# Altium PCB Son_BU_V2.PcbDoc
Units mil, origin at the board's own origin, x right, y up, seen from the top; angles counter-clockwise.
Board outline 6000 x 4000 mil, 2 copper layers (Top Layer, Bottom Layer); 38 components, 24 nets, 120 pads, 33 vias.
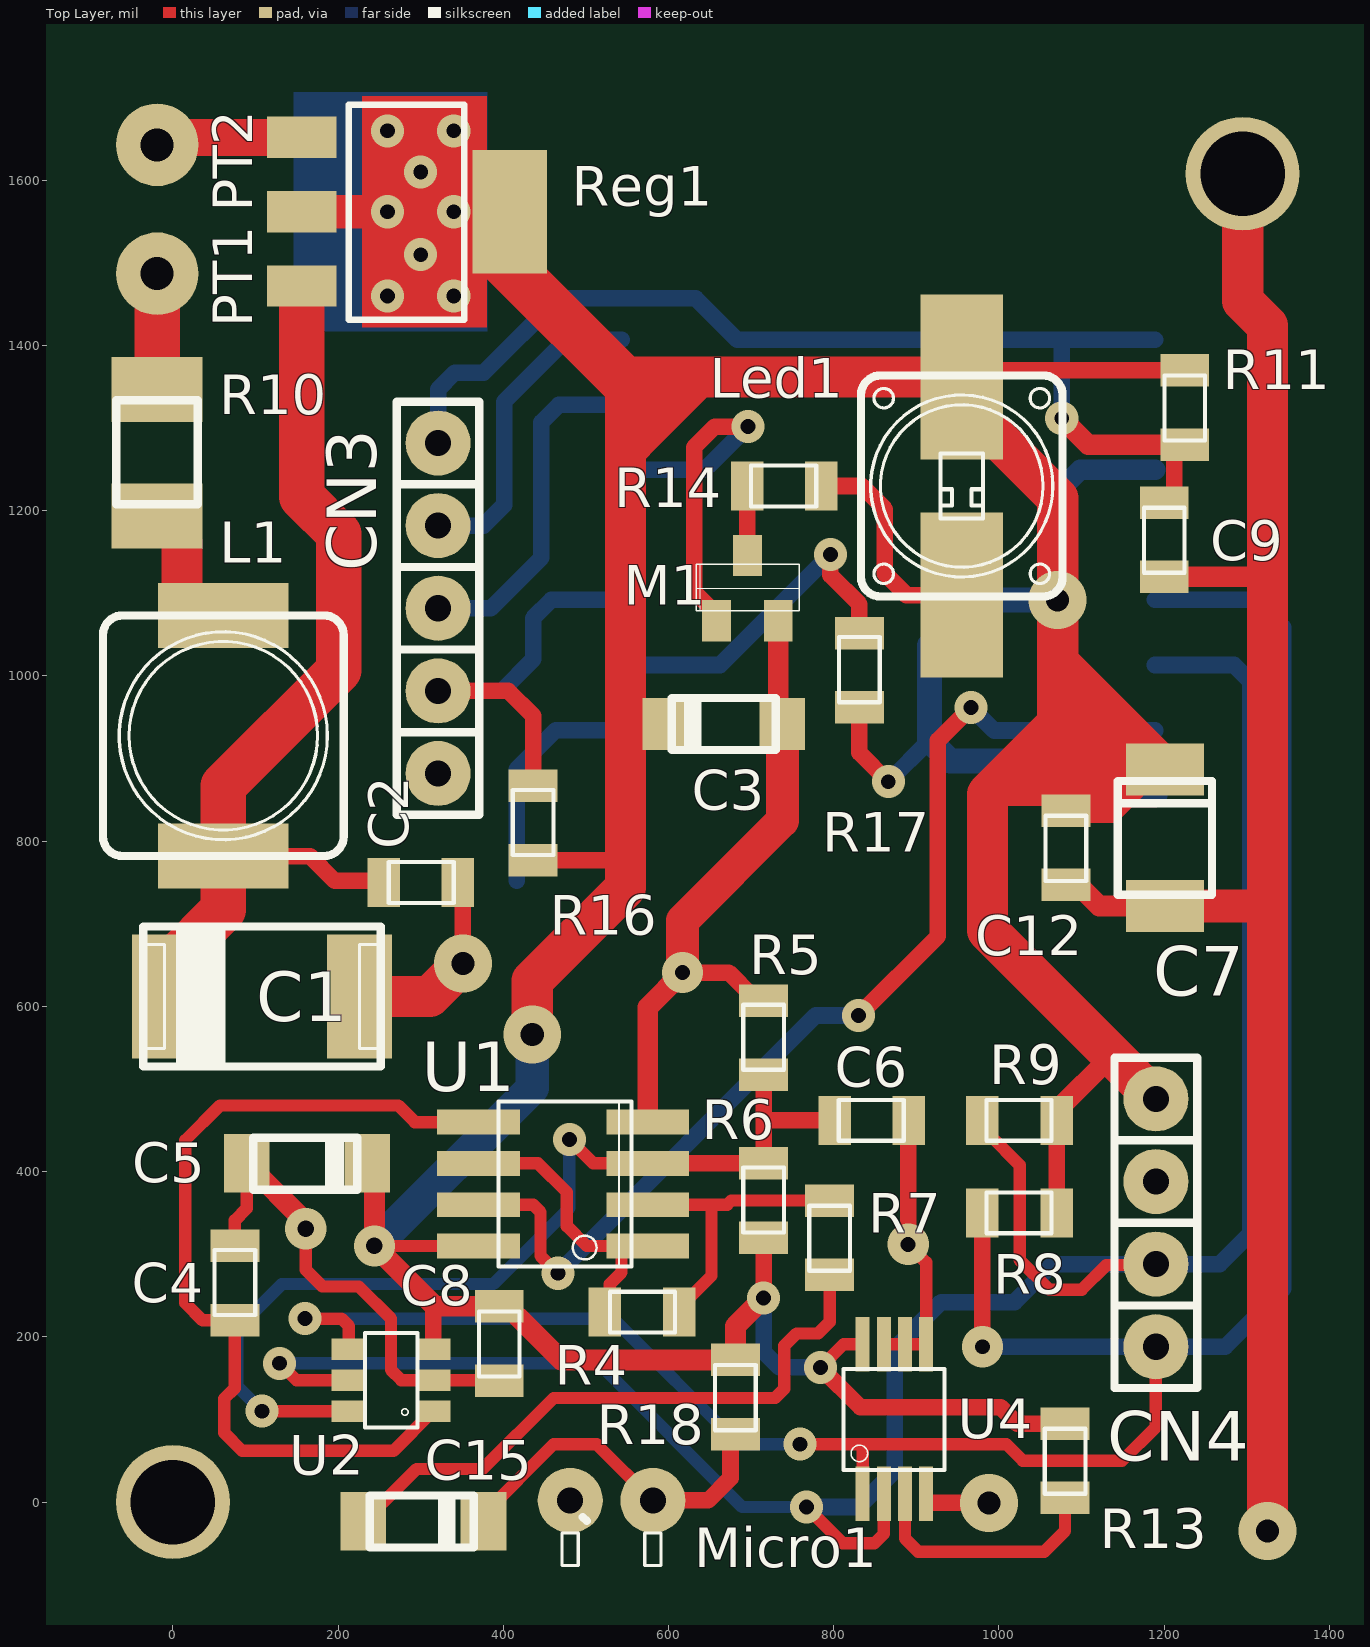
[diagram p0: Top Layer view]
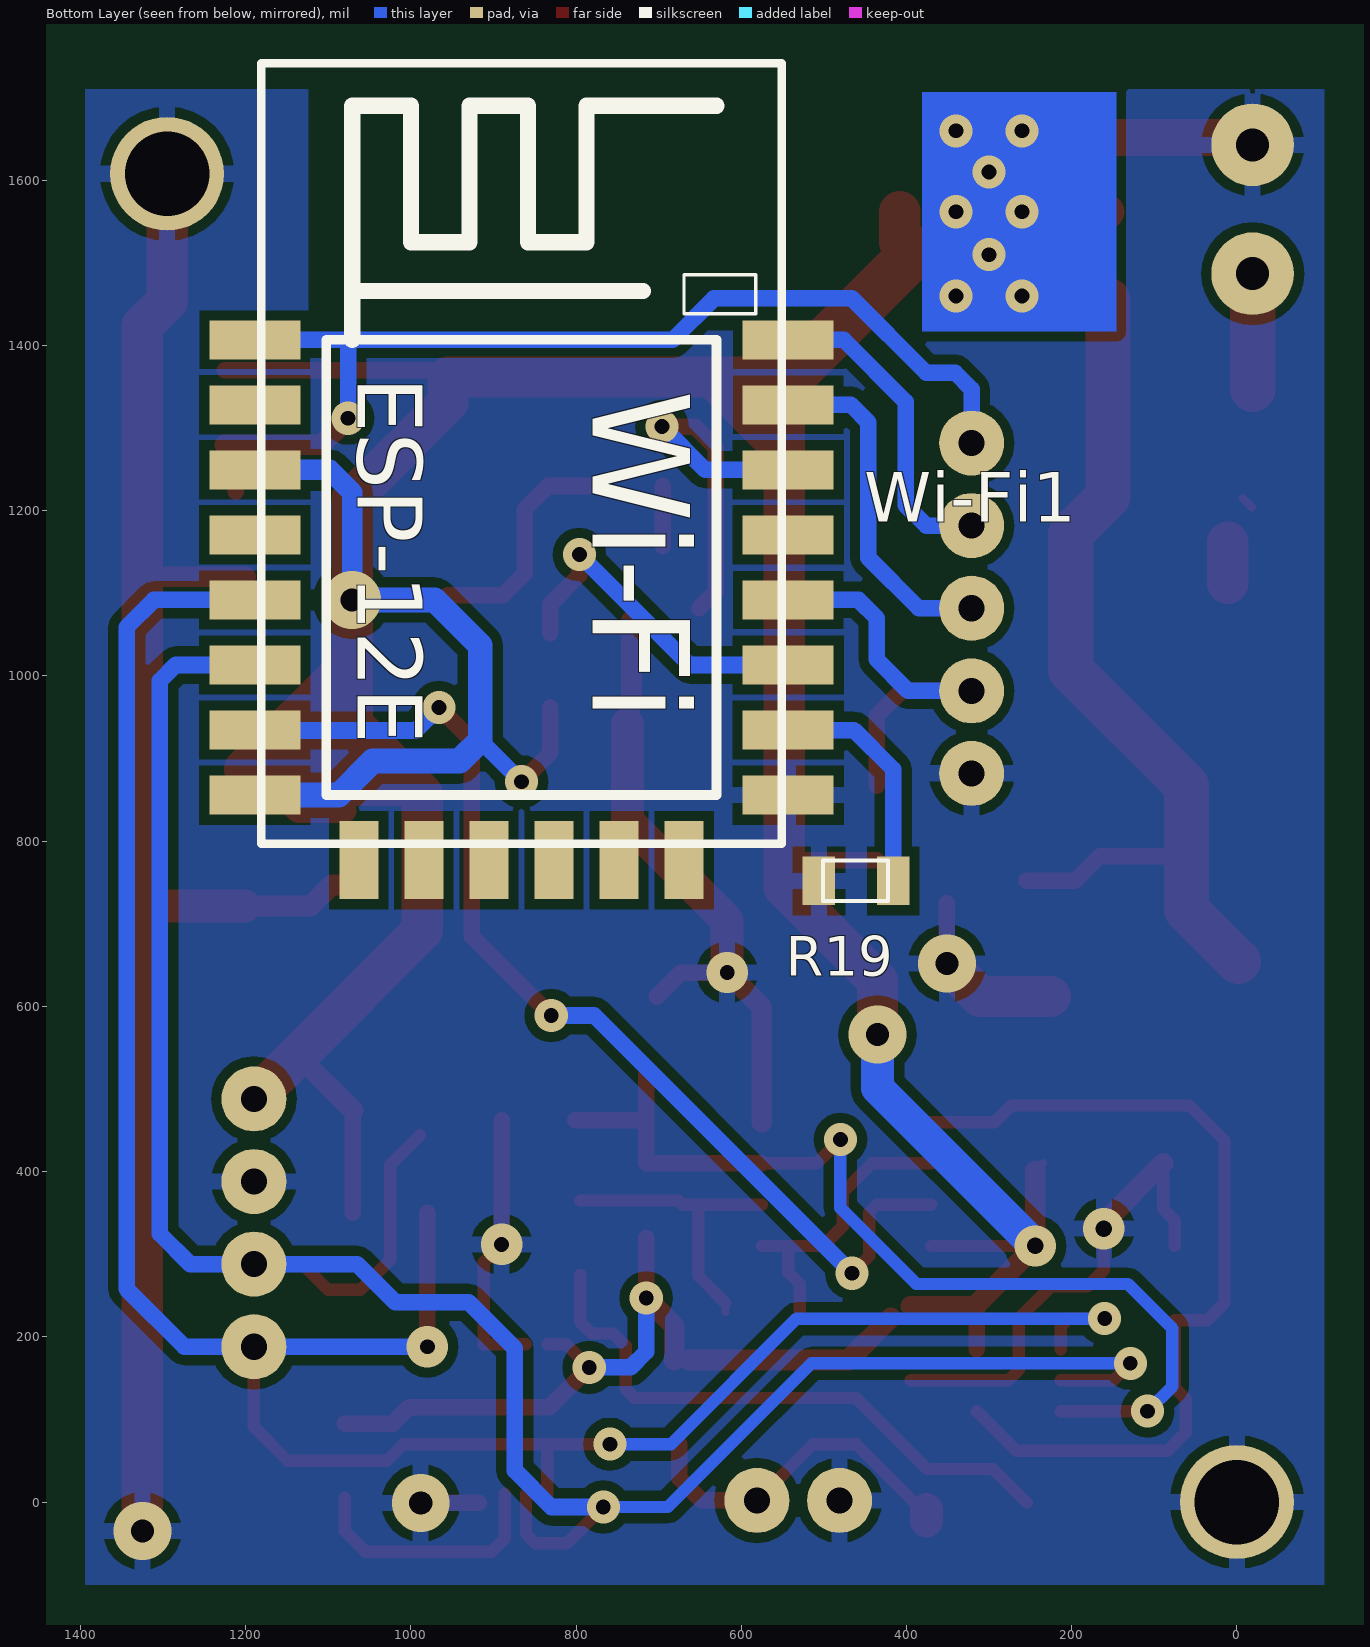
[diagram p1: Bottom Layer view, seen from below]

## Layer stack, top to bottom
Top Layer: signal copper 1.4
Dielectric: dielectric 12.6, FR-4, Dk 4.8
Bottom Layer: signal copper 1.4

## Board outline
-1419,-873 4581,-873 4581,3127 -1419,3127

## Design rules (kind name [scope] priority, off if disabled: settings)
Clearance [All] p1: gap=8
ComponentClearance [All] p1: gap=5 collisioncheckmode=3 verticalgap=10 showdistances=FALSE
PolygonConnect [All] p1: connectstyle=Relief reliefconductorwidth=20 reliefentries=4 polygonreliefangle="90 Angle"
RoomDefinition Son_BU_V2 [InComponentClass('Son_BU_V2')] p1: confinementstyle=ConfineIn formatcopy=TRUE lockcomponents=FALSE outline -136,-126 1424,-126 1424,1786 -136,1786
RoutingVias [All] p1: holewidth=28 width=50 viastyle="Through Hole" minholewidth=14 minwidth=40 maxholewidth=28 maxwidth=80
SilkscreenOverComponentPads [All] p1: minsilkscreentomaskgap=10
SolderMaskExpansion [All] p1: expansion=5
Width [All] p1: maxlimit=100 minlimit=10 preferedwidth=10
26 further rules are at their usual default settings.

## Components (designator, comment, footprint, x,y, rotation, side; value= is the part's Value field where it differs from the comment)
C1 "220µF/16V" 7343-31 226,612 r180 top
C2 "100n" 0805 345,750 r180 top
C3 "10µF/16V" "Tantale 10µF/16V" 596,942 r180 top
C4 "100n" 0805 75,310 r270 top
C5 "10µF/6V3 tantale" "Tantale 10µF/6V3" 235,410 r180 top
C6 "10n" 0805 801,462 r0 top
C7 "47µF/10V tantale" "tantale 47µF/10V" 1201,887 r270 top
C8 "100n" 0805 395,147 r90 top
C9 "100n" 0805 1200,1120 r90 top
C12 "100n" 0805 1081,747 r90 top
C15 "1µF/16V" 3216-18 376,-23 r180 top
CN3 "inch_ligne 1x5" INCH_1x5_droit 321,1282 r270 top
CN4 "inch_ligne 1x4" INCH_1x4_droit 1190,488 r270 top
L1 "70µH CD74R series" "SELF CD74R" 61,782 r270 top
Led1 "LTW5AM" LTW5AM 955,1230 r270 top
M1 "NTR4501N" "SOT23 (NTR4501)" 658,1067 r0 top
Micro1 "Electret" "Micro_electret simple" 581,2 r0 top
PT1 "+ Alim" "Pointe de test"#1 -19,1487 r0 top
PT2 "- Alim" "Pointe de test"#2 -19,1647 r0 top
R4 "100K" 0805 613,230 r180 top
R5 "10K" 0805 715,607 r270 top
R6 "10K" 0805 715,410 r270 top
R7 "1K" 0805 795,275 r90 top
R8 "10K" 0805 980,350 r0 top
R9 "10K" 0805 980,462 r0 top
R10 "0R33" 1210 -19,1347 r270 top
R11 "10K" 0805 1225,1280 r90 top
R13 "10K" 0805 1080,5 r90 top
R14 "68" 0805 695,1230 r0 top
R16 "10K" 0805 436,867 r270 top
R17 "10K" 0805 831,1052 r270 top
R18 "2K" 0805 681,82 r90 top
R19 "2K2" 0805 506,752 r180 bottom
Reg1 "LM1117" SOT223 156,1652 r270 top
U1 "AD8052" SOIC08 575,310 r180 top
U2 "MCP4706" SOT23-6 315,110 r180 top
U4 "MCP9808" MSOP-08 835,10 r90 top
Wi-Fi1 "ESP-12E" ESP-12E 1181,1407 r180 bottom

## Footprints (in the part's own frame and the unit in brackets; to place one, negate y for a bottom-side part, rotate by r counter-clockwise, add the part's x,y. Pads: shape width x height; smd on the part's side, far side on the other; paste and mask are expansions set on the pad)
0805 [mm] "résistance CMS"
  rect 1x1.5 smd: 1(0,0) 2(2.286,0)
  silkscreen extent 0.13,-0.63 2.13,0.63
1210 [mm] "résistance CMS 0,5W ERJ14B"
  rect 2x2.8 smd: 1(0,0) 2(3.9,0)
  silkscreen extent 0.33,-1.26 3.53,1.24
3216-18 [mm] "condensateur tantale CMS (3,2 x 1,6 x 1,6)"
  rect 1.4x1.8 smd: 1(0,0) 2(3.7,0)
  silkscreen extent 0.3,-0.79 3.5,0.81
7343-31 [mm] "condensateur tantale CMS (7,3 x 4,3 x 3,0)"
  rect 2x3.8 smd: 1(6,0) 2(0,0)
  silkscreen extent -0.65,-2.15 6.65,2.15
ESP-12E [mm] "module Wi-Fi"
  rect 2.8x1.2 smd: 1(-0.2,0) 2(-0.2,-2) 3(-0.2,-4) 4(-0.2,-6) 5(-0.2,-8) 6(-0.2,-10) 7(-0.2,-12) 8(-0.2,-14) 15(16.2,-14) 16(16.2,-12) 17(16.2,-10) 18(16.2,-8) 19(16.2,-6) 20(16.2,-4) 21(16.2,-2) 22(16.2,0)
  rect 1.2x2.4 smd: 9(3,-16) 10(5,-16) 11(7,-16) 12(9,-16) 13(11,-16) 14(13,-16)
  silkscreen extent 0,-15.5 16,8.5
INCH_1x4_droit [mm] "simple rangée 2,54 mm"
  round 2 hole 0.8: 1(0,0) 2(2.54,0) 3(5.08,0) 4(7.62,0)
  silkscreen extent -1.27,-1.27 8.89,1.27
INCH_1x5_droit [mm] "simple rangée 2,54 mm"
  round 2 hole 0.8: 1(0,0) 2(2.54,0) 3(5.08,0) 4(7.62,0) 5(10.16,0)
  silkscreen extent -1.27,-1.27 11.43,1.27
LTW5AM [mil] "LED golden dragon"
  rect 200x100 smd: 1(-132,0) 2(132,0)
  silkscreen extent -134,-122 134,122
"Micro_electret simple" [mm] "Microphone coudé sur PCB sans sérigraphie"
  round 2 hole 0.8: 0(-2.54,0) 1(0,0)
  silkscreen extent -2.79,-2 0.25,-0.51
MSOP-08 [mil] "boîtier DGK"
  rect 66x17 smd: 1(0,0) 2(0,-25.59) 3(0,-51.18) 4(0,-76.77) 5(181.1,-76.77) 6(181.1,-51.18) 7(181.1,-25.59) 8(181.1,0)
  silkscreen extent 29,-99 151,23
"Pointe de test"#1 [mil] "Farnell 133-6225"
  round 100 hole 40: 1(0,0)
"Pointe de test"#2 [mil] "Farnell 133-6225"
  round 100 hole 40: 1(0,-4)
"SELF CD74R" [mm] "Self 7,4 x 7,4"
  rect 2x4 smd: 1(0,0) 2(-7.4,0)
  silkscreen extent -7.4,-3.7 0,3.7
SOIC08 [mil]
  rect 100x30 smd: 1(0,0) 2(0,-50) 3(0,-100) 4(0,-150) 5(205,-150) 6(205,-100) 7(205,-50) 8(205,0)
  silkscreen extent 20,-175 181,25
"SOT23 (NTR4501)" [mil] "D->1 G->2 S->3"
  rect 35x50 smd: 1(37.4,78.74) 2(0,0) 3(74.8,0)
  silkscreen extent -25,12 100,68
SOT23-6 [mil]
  rect 42x26 smd: 1(0,0) 2(0,-37.4) 3(0,-74.8) 4(102,-74.8) 5(102,-37.4) 6(102,0)
  silkscreen extent 19,-94 83,20
SOT223 [mil] "empreinte générale SOT223"
  rect 50x84.65 smd: 1(0,0) 2(90,0) 3(180,0)
  rect 150x90 smd: 2(90,251.97)
  silkscreen extent -39,57 220,197
"Tantale 10µF/6V3" [mm] "1206 ou 3216-18 (175-4041)"
  rect 1.4x1.8 smd: 1(0,0) 2(3.7,0)
  silkscreen extent 0.3,-0.79 3.5,0.81
"Tantale 10µF/16V" [mm] "1206 ou 3216-18 (145-7461)"
  rect 1.4x1.6 smd: 1(0,0) 2(-3.6,0)
  silkscreen extent -3.4,-0.81 -0.2,0.8
"tantale 47µF/10V" [mm] "1210 ou 3528-21 (175-4168)"
  rect 1.6x2.4 smd: 1(0,0) 2(4.2,0)
  silkscreen extent 0.36,-1.45 3.86,1.45

## Part data
C1: library part "tantale 220µF/16V", "253-5290 case 7343-31"
C2 C4 C6 C8 C9 C12: library part Cap_CMS_0805, "CMS 0805"
C3: library part "tantale 10µF/16V", "145-7461 case 3216-18"
C5: library part "tantale 10µF/6V3", "175-4041 ou 145-7412 case 3216-18"
C7: library part "tantale 47µF/10V", "175-4168"
C15: library part "tantale 1µF/16V", "145-7406 case 3216-18"
CN3: library part Inch_1x5_droit, "Inch_1x5_droit"
CN4: library part Inch_1x4_droit, "Inch_1x4_droit"
L1: library part "Self CD74R", "SMT CD74R Aliexpress"
Led1: library part "LTW5AM LED", "LED Golden Dragon Plus"
M1: "MOSFET canal N"
Micro1: library part Microphone_03, "Microphone électret"
PT1 PT2: library part PTEST, "pointe de test CI 133-6225"
R4 R5 R6 R7 R8 R9 R11 R13 R14 R16 R17 R18 R19: library part "Res CMS 0805", "CMS 0805"
R10: library part "Res CMS 1210 ERJ14B", "CMS 1210"
Reg1: library part LM1117/800mA, "Régulateur SOT-223"
U1: "AOP"
U2: library part MCP4706_1, "DAC I2C (RS : 738-7111)"
U4: "Digital temperature Sensor"
Wi-Fi1: "ESP-12E module Wi-Fi"

## Free pads (board coordinates)
  round 137.8 hole 102.36: 1(1295,1608) 2(0,0)

## Via types
v1: diameter 40, hole 18, Top Layer to Bottom Layer, 23 vias
v2: diameter 70, hole 28, Top Layer to Bottom Layer, 5 vias
v3: diameter 50, hole 18, Top Layer to Bottom Layer, 3 vias
v4: diameter 50, hole 20, Top Layer to Bottom Layer, 2 vias

## Nets (pads, with @x,y where several pads share a name; then routed paths per layer and width w, separated by ;. In a path a pad name is that pad's centre, name@x,y a point inside that pad or via, vN(x,y) a via of type N, cw(c..) or ccw(c..) an arc to the next point about the centre after c; other vN are vias at no path point)
3V3: C3.1 C5.1 C7.1 C8.2 C12.2 CN4.1 Led1.1 R6.2 R8.2 R9.2 R11.2 R13.2 R16.2 R17.2 R18.2 Reg1.2 U1.8 U2.3 U4.8 Wi-Fi1.3 Wi-Fi1.8 | length 6298.9
  Top Layer w10: C5.1 C5.1@244,401
  Top Layer w15: v4(244,310) U1.8 ; v1(784,163) 812.1,191.1 U4.8@834.09,191.1
  Top Layer w20: U2.3 315,239 ; R16.2 547,777 ; v1(715,247) R6.2 ; v1(784,163) 832,115 1002,115 1022,95 R13.2 ; R17.2 831,907 v1(866,872) ; Led1.1@963,1370 R11.2 ; R8.2 R9.2 R9.2@1070,474
  Top Layer w25: C5.1@244,401 v4(244,310) 315,239 ; 317,237 C8.2 ; C8.2@419,223 470,172 R18.2@663,172 ; R18.2 681,213 v1(715,247) ; R9.2@1070,474 1137,541
  Top Layer w30: C12.2 1136,837 C7.1@1173.5,874.5
  Top Layer w40: Reg1.2@156,1562 v1(260,1562)
  Top Layer w50: Reg1.2@407.97,1525.03 Reg1.2@407.97,1562 ; v2(435,566) 435,631 548,744 548,776 ; 547,777 548,776 ; 572,1331 572,1298 ; 1096,967 986,857 986,692 1137,541 CN4.1 ; C7.1 1071,1017 v2(1071,1092) 1071,1215 955,1331 Led1.1 636,1362 572,1298 ; 548,776 548,1274 572,1298
  Top Layer w60: Reg1.2@388.5,1514.5 572,1331
  Bottom Layer w20: v1(715,247) 715,182 734,163 v1(784,163) ; v1(866,872) 916,922
  Bottom Layer w25: v2(1071,1092) 1071,1222 1098.52,1249.52 Wi-Fi1.3
  Bottom Layer w30: v2(1071,1092) 971,1092 916,1037 916,922 941,897 1046,897 1087.18,855.82 Wi-Fi1.8
  Bottom Layer w40: v4(244,310) 435,501 v2(435,566)
  other v1: 260,1460 340,1460 300,1510 340,1562 300,1610 260,1660 340,1660
GND: C1.2 C2.1 C3.2 C4.1 C5.2 C6.2 C7.2 C8.1 C9.1 C12.1 CN3.5 CN4.2 M1.3 Micro1.0 pad.1 pad.2 PT2.1 R5.1 R19.1 Reg1.1 U1.4 U2.2 U4.4 U4.5 U4.6 U4.7 Wi-Fi1.15 | length 4163.8
  Top Layer w10: PT2.1 PT2.1@2,1622 ; v4(161,331) v4@161,338.33 ; C8.1@394.6,147.4 C8.1
  Top Layer w15: C4.1 75,341 89.33,355.33 C5.2 ; v4(161,331) 161,281 181,261 225,261 264,222 264,160 276.6,147.4 U2.2 C8.1@394.6,147.4 ; U4.7 U4.6 U4.5 911.77,290.23 v3(890,312)
  Top Layer w20: v2(351,652) C2.1@351,725 ; v3(617,641) 673,641 R5.1@702,612 ; v3(890,312) C6.2@890,462 ; U4.4@918,-1 v2(988,-1)
  Top Layer w25: C5.2 v4@161,338.33 ; U1.4 575,599 v3(617,641) ; C3.2@732.8,965 M1.3 ; C12.1 1096,747 1121.35,721.65 C7.2 ; C9.1 1325,1120
  Top Layer w40: v3(617,641) 617,704 737.73,824.73 C3.2 ; C7.2 1324.65,721.65
  Top Layer w45: PT2.1@11,1652 Reg1.1
  Top Layer w50: C1.2 311,612 v2(351,652) ; pad.1 1295,1454 1325,1424 1325,1120 v2(1325,-35)
NetC1_1: C1.1 C2.2 L1.1 Reg1.3 | length 1109.4
  Top Layer w20: L1.1 166,782 196,752 C2.2@255,752
  Top Layer w55: C1.1@-1.5,654.5 61,717 L1.1 61,867 201,1007 201,1172 156,1217 Reg1.3@156,1455
NetC4_2: C4.2 U1.5 U2.1 | length 1069.8
  Top Layer w15: U2.1 267,62 84,62 62,84 62,125 75,138 C4.2 36,220 15,241 15,438 57,480 273,480 293,460 U1.5
NetC6_1: C6.1 R5.2 R6.1 U1.3 U2.6 | length 1199.9
  Top Layer w15: v1(108,110) U2.6 ; v1(480,439) 509,410 U1.3
  Top Layer w20: U1.3 R6.1 R5.2 ; 718,462 C6.1
  Bottom Layer w15: v1(108,110) 78,140 78,210 132,264 388,264 480,356 v1(480,439)
NetC9_2: C9.2 CN3.1 R11.1 Wi-Fi1.1 | length 1301.4
  Top Layer w20: C9.2@1212,1223 R11.1@1212,1268
  Top Layer w25: v1(1076,1312) 1108,1280 R11.1
  Bottom Layer w20: CN3.1 321,1347 341,1367 376,1367 466,1457 633,1457 683,1407 1076,1407 ; v1(1076,1312) 1076,1407 ; Wi-Fi1.1 1076,1407
NetC15_1: C15.1 Micro1.1 R18.1 | length 428.4
  Top Layer w15: C15.1@376,-14.86 460.86,70 513,70 Micro1.1
  Top Layer w20: Micro1.1 648,2 675,29 R18.1@675,70
  Top Layer w40: C15.1 376,-14.86 C15.1@376,-9.13
NetC15_2: C15.2 R7.1 | length 718.5
  Top Layer w15: C15.2@254.5,-0.5 295,40 375,40 461,126 729,126 740,137 740,189 755,204 781,204 795,218 R7.1
NetCN3_2: CN3.2 Wi-Fi1.22 | length 388.6
  Bottom Layer w20: CN3.2 376,1182 401,1207 401,1332 476,1407 Wi-Fi1.22
NetCN3_3: CN3.3 Wi-Fi1.21 | length 420.3
  Bottom Layer w20: CN3.3 385.05,1082 446,1142.95 446,1307 467.26,1328.26 Wi-Fi1.21
NetCN3_4: CN3.4 R16.1 Wi-Fi1.18 | length 509.5
  Top Layer w20: CN3.4 406,982 436,952 R16.1
  Bottom Layer w20: CN3.4 398,982 436,1020 436,1070 458.04,1092.04 Wi-Fi1.18
NetCN4_3: CN4.3 R9.1 U2.5 U4.2 Wi-Fi1.6 | length 2870.4
  Top Layer w10: v1@129,167 v1@135,161
  Top Layer w15: v1(129,168) 149.6,147.4 U2.5 ; v1(767,-6) 811,-50 849,-50 860.59,-38.41 U4.2 ; R9.1@989,444 1025,408 1025,293 1061,257 1100,257 1130,287 CN4.3@1173,287
  Bottom Layer w15: v1(129,168) 515,168 689,-6 v1(767,-6)
  Bottom Layer w20: v1(767,-6) 830,-6 874,38 874,186 930,242 1019,242 1065,288 CN4.3 1267.19,288 1304,324.81 1304,994 1284.7,1013.3 Wi-Fi1.6
NetCN4_4: CN4.4 R8.1 U2.4 U4.1 Wi-Fi1.5 | length 2885
  Top Layer w15: v1(160,222) 204,222 213,213 U2.4 ; v1(759,70) 835,70 ; U4.1 835,70 ; CN4.4 1190,91 1149,50 1029,50 1009,70 835,70
  Top Layer w20: v3(980,188) R8.1
  Bottom Layer w15: v1(160,222) 533,222 685,70 v1(759,70)
  Bottom Layer w20: v3(980,188) CN4.4 1274,188 1344,258 1344,1059 1310.96,1092.04 Wi-Fi1.5
NetL1_2: L1.2 R10.2 | length 66
  Top Layer w10: R10.2@-18.34,1204.12 R10.2@-7,1215.46
  Top Layer w50: L1.2@11,1112 R10.2@11,1162
NetLed1_2: Led1.2 R14.2 | length 270.4
  Top Layer w20: R14.2 834,1230 862,1202 862,1124 888,1098 Led1.2
NetM1_1: M1.1 R14.1 | length 73
  Top Layer w20: M1.1@695,1157 R14.1
NetM1_2: M1.2 Wi-Fi1.20 | length 453.2
  Top Layer w20: M1.2@651,1082 631,1102 631,1277 656,1302 v1(696,1302)
  Bottom Layer w20: Wi-Fi1.20 643.52,1249.52 v1(696,1302)
NetPT1_1: PT1.1 R10.1 | length 140
  Top Layer w55: R10.1 PT1.1
NetR4_1: R4.1 R7.2 U1.2 | length 365.7
  Top Layer w10: R4.1@619,230 R4.1@619,241
  Top Layer w15: U1.2 652,360 ; R4.1@619,241 652,274 652,360 ; R7.2 676,365 671,360 652,360
NetR4_2: R4.2 U1.1 U1.6 | length 347.2
  Top Layer w15: U1.6 442,410 477,375 477,334 501,310 U1.1 ; R4.2@529,230 529,264 543,278 U1.1@543,301
NetR13_1: R13.1 U4.3 | length 304.9
  Top Layer w15: U4.3 886.18,-44.18 902,-60 1055,-60 1080,-35 R13.1
NetR17_1: R17.1 Wi-Fi1.17 | length 417.7
  Top Layer w20: v1(796,1147) 796,1122 831,1087 R17.1
  Bottom Layer w20: Wi-Fi1.17 662.3,1013.3 v1(796,1147)
NetR19_2: R19.2 Wi-Fi1.16 | length 281.9
  Bottom Layer w20: R19.2 416,887 463.56,934.56 Wi-Fi1.16
NetU1_7: U1.7 Wi-Fi1.7 | length 1322.5
  Top Layer w15: U1.7 436,360 445,351 445,298 v1(466,277)
  Top Layer w20: v1(830,589) 926,685 926,922 v1(966,962) v1@968,962
  Bottom Layer w20: v1(466,277) 778,589 v1(830,589) ; v1@968,962 v1(966,962) 994,934 Wi-Fi1.7@1188.87,934
pads on no net: Wi-Fi1.2 Wi-Fi1.4 Wi-Fi1.9 Wi-Fi1.10 Wi-Fi1.11 Wi-Fi1.12 Wi-Fi1.13 Wi-Fi1.14 Wi-Fi1.19

## Polygon pours and split planes (outlines as drawn)
GND on Bottom Layer "Bottom Layer-No Net" (solid, pour order 1000): -106,1710 390,1710 390,1416 392,1418 1124,1418 1124,1710 1394,1710 1394,-100 -106,-100 -106,1710

## Other copper
Top Layer:
  rectangle net 3V3: 986,842.72 1066,887
  rectangle net 3V3: 1066,842.72 1141.72,907
  rectangle net 3V3: 1101,852 1166,937
  rectangle net 3V3: 1036,887 1081,922
  rectangle net 3V3: 1046,912 1086,1032
  rectangle net 3V3: 523,1268 570,1362
  rectangle net 3V3: 543,1335 643,1387
  rectangle net 3V3: 229,1422 380,1702
  rectangle net 3V3: 1071,882 1151,947
  rectangle net 3V3: 1006,852 1081,887
Bottom Layer:
  rectangle net 3V3: 146,1417 381,1707

## Silkscreen, mask and mechanical layers (free items; w line width, h text height)
Mechanical 1:
  lines w10: -105,-100 1395,-100 1395,1710 -105,1710 -105,-100

## Text inside footprints (layer, text, board x,y; h text height)
Wi-Fi1: Bottom Overlay "Wi-Fi" at 780,1346 h118.11 r90